# EAGLE board MainsLog-Sensor-SR (EAGLE 5.11)
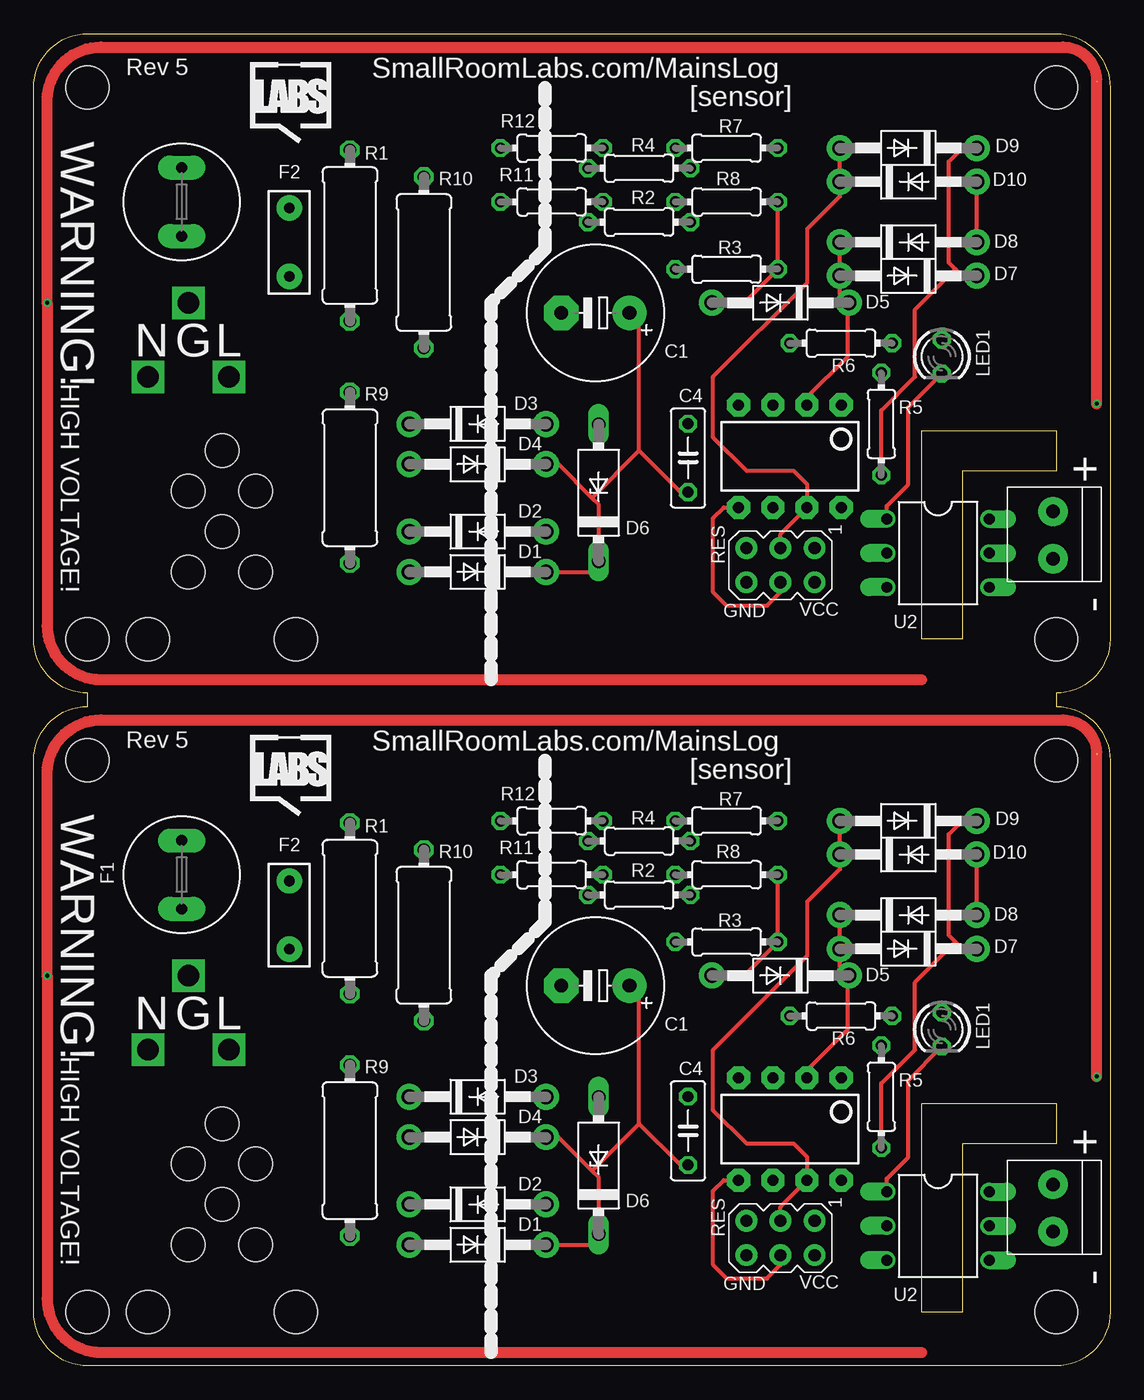
[diagram p0: board, top side]
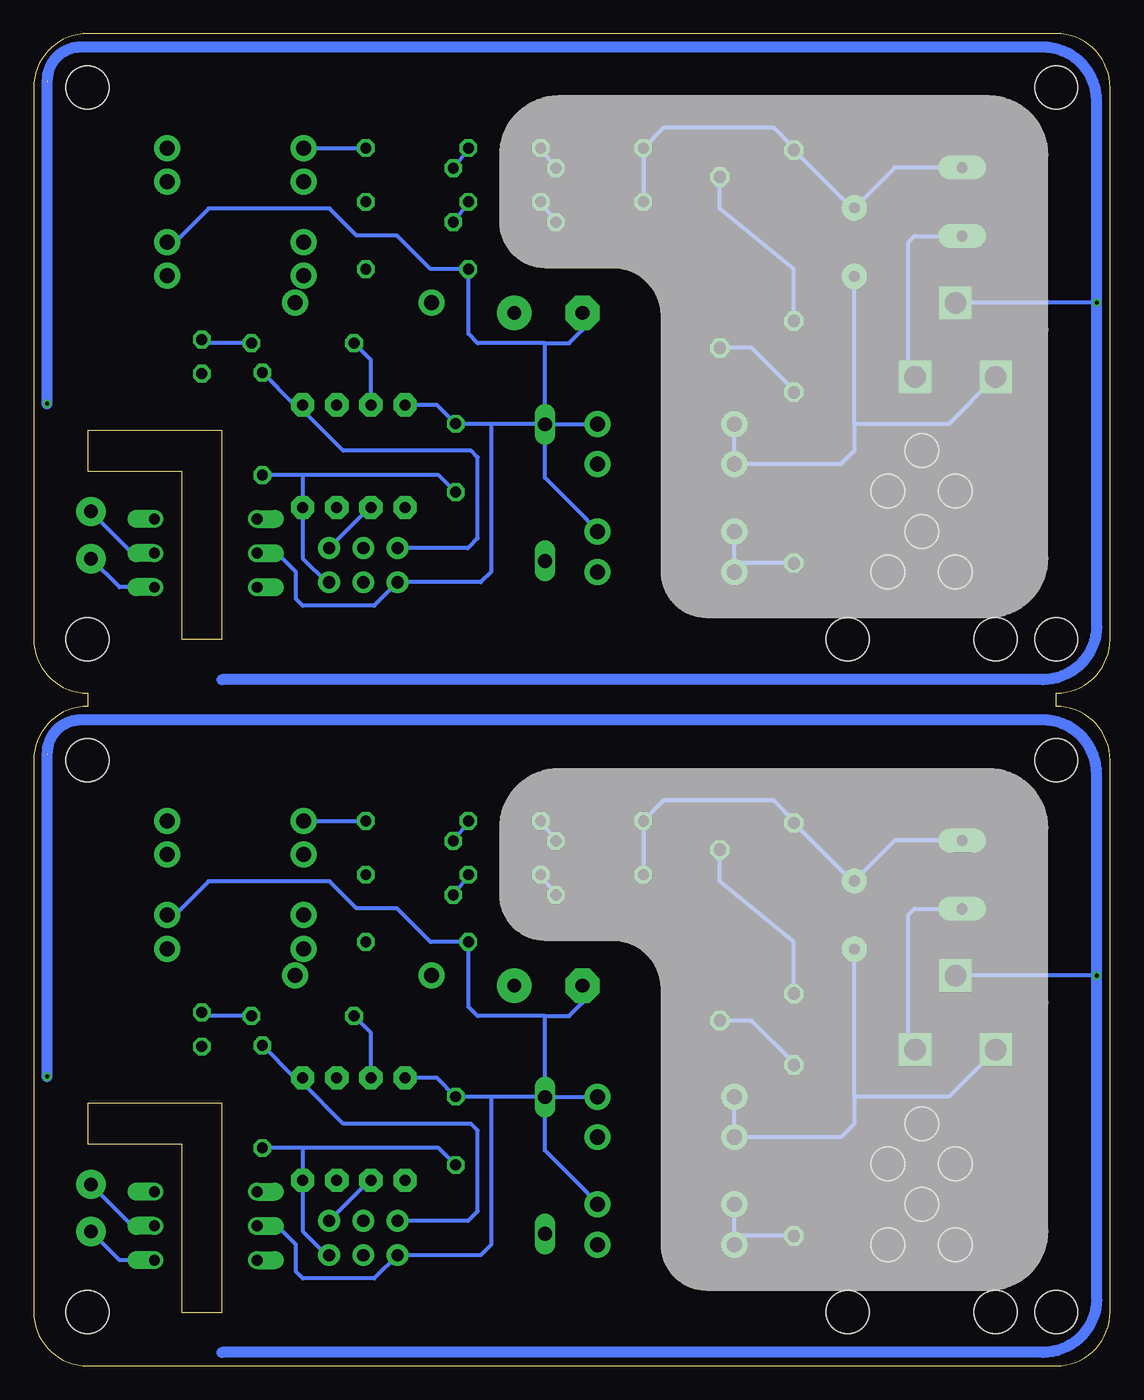
[diagram p1: board, bottom side, seen from below]

Size 80 x 99 mm. Coordinates in mm from the lower left corner, seen from the top.
Outline: 0,95 arc-90 4,99 76,99 arc-90 80,95 80,54 arc-90 76,50 76,49 arc-90 80,45 80,4 arc-90 76,0 4,0 arc-90 0,4 0,45 arc-90 4,49 4,50 arc-90 0,54 0,95
Copper layers (1*16): Top 0.035mm / dielectric 1.5mm / Bottom 0.035mm
Design rules "Fusion_eagle_rule_v1.1": minimum track width 6mil, minimum drill 12mil, track to track 6mil, track to pad 6mil, pad to pad 6mil, via to via 6mil, smd to smd 0mil, copper to edge 10mil, drill to drill 10mil, minimum pad ring 10mil, minimum via ring 6mil, stop-mask expansion 2mil, vias tented up to drill 100mil, thermal gap 10mil
Net classes: 0 default: width 0.305 mm, drill 0.305 mm, clearance 0.5 mm; 1 HV: width 0.305 mm, drill 0.305 mm, clearance 2 mm
Holes 2.5 mm at 11.5,9 11.5,15 16.5,9 16.5,15 14,12 14,18 11.5,59 11.5,65 16.5,59 16.5,65 14,62 14,68
Holes 3.2 mm at 8.5,4 19.5,4 4,45 4,4 76,4 76,45 8.5,54 19.5,54 4,95 4,54 76,54 76,95
Milling: 12 lines

## Footprints (pad centres in the part's own frame; a part is rotated, then mirrored left to right if it is on the bottom)
E5-10,5 = drill 1.016 pad 2.54 round: + -2.54,0 | drill 1.016 pad 2.54 octagon: - 2.54,0
C050-025X075 = drill 0.813 octagon: 1 -2.54,0; 2 2.54,0
DO41-10 = drill 1.118 pad 1.93 round: A 5.08,0; C -5.08,0
F126Z10 = drill 1.016 long: A 5.08,0; C -5.08,0
TR5 = drill 0.813 pad 1.778 long: 1 -2.54,0; 2 2.54,0
PTC = drill 0.8 pad 1.88 round: P$1 -2.54,0; P$2 2.54,0
AVRISP = drill 0.9 pad 1.626 round: 1 -1.27,2.54; 2 1.27,2.54; 3 -1.27,0; 4 1.27,0; 5 -1.27,-2.54; 6 1.27,-2.54
1X2-3.5MM = drill 1 pad 2.184 round: 1 1.8,0; 2 -1.7,0
LED3MM = drill 0.813 octagon: A -1.27,0; K 1.27,0
0411/12 = drill 0.914 octagon: 1 -6.35,0; 2 6.35,0
0204/7 = drill 0.813 octagon: 1 -3.81,0; 2 3.81,0
DIP08 = drill 0.813 pad 1.727 octagon: 1 -3.81,-3.81; 2 -1.27,-3.81; 3 1.27,-3.81; 4 3.81,-3.81; 5 3.81,3.81; 6 1.27,3.81; 7 -1.27,3.81; 8 -3.81,3.81
DIL06 = drill 0.813 offset: 1 -2.54,-3.81; 2 0,-3.81; 3 2.54,-3.81; 4 2.54,3.81; 5 0,3.81; 6 -2.54,3.81

## Placement (x,y rotation side)
C1  470u  [E5-10,5]  41.75,28.25 180 top
C2  470u  [E5-10,5]  41.75,78.25 180 top
C3  100nF  [C050-025X075]  48.63,67.47 90 top
C4  100nF  [C050-025X075]  48.63,17.47 90 top
D1  1N4004  [DO41-10]  33,9 180 top
D2  1N4004  [DO41-10]  33,12 0 top
D3  1N4004  [DO41-10]  33,20 0 top
D4  1N4004  [DO41-10]  33,17 180 top
D5  1N4004  [DO41-10]  55.5,29 180 top
D6  5.1v  [F126Z10]  41.99,14.89 90 top
D7  1N4004  [DO41-10]  65,31 180 top
D8  1N4004  [DO41-10]  65,33.5 0 top
D9  1N4004  [DO41-10]  65,40.5 180 top
D10  1N4004  [DO41-10]  65,38 0 top
D11  1N4004  [DO41-10]  33,59 180 top
D12  1N4004  [DO41-10]  33,67 180 top
D13  1N4004  [DO41-10]  33,62 0 top
D14  1N4004  [DO41-10]  33,70 0 top
D15  5.1v  [F126Z10]  41.99,64.89 90 top
D16  1N4004  [DO41-10]  55.5,79 180 top
D17  1N4004  [DO41-10]  65,81 180 top
D18  1N4004  [DO41-10]  65,83.5 0 top
D19  1N4004  [DO41-10]  65,90.5 180 top
D20  1N4004  [DO41-10]  65,88 0 top
F1  [TR5]  11,36.5 270 top
F2  PTCPTH  [PTC]  19,33.5 270 top
F3  [TR5]  11,86.5 270 top
F4  PTCPTH  [PTC]  19,83.5 270 top
ICSP  AVRISP-6  [AVRISP]  55.5,9.5 270 top
ICSP1  AVRISP-6  [AVRISP]  55.5,59.5 270 top
J1  1X2-3.5MM  [1X2-3.5MM]  75.75,61.69 90 top
J2  1X2-3.5MM  [1X2-3.5MM]  75.75,11.69 90 top
LED1  [LED3MM]  67.5,25 270 top
LED2  [LED3MM]  67.5,75 270 top
R1  270  [0411/12]  23.5,34 270 top
R2  470k  [0204/7]  45,35 0 top
R3  4k7  [0204/7]  51.5,31.5 0 top
R4  470k  [0204/7]  45,39 0 top
R5  20k  [0204/7]  63,20 270 top
R6  270  [0204/7]  60,26 0 top
R7  470k  [0204/7]  51.5,40.5 0 top
R8  470k  [0204/7]  51.5,36.5 0 top
R9  270  [0411/12]  23.5,16 270 top
R10  270  [0411/12]  29,32 270 top
R11  470k  [0204/7]  38.5,36.5 0 top
R12  470k  [0204/7]  38.5,40.5 0 top
R13  270  [0411/12]  23.5,84 270 top
R14  470k  [0204/7]  45,85 0 top
R15  4k7  [0204/7]  51.5,81.5 0 top
R16  270  [0204/7]  60,76 0 top
R17  470k  [0204/7]  45,89 0 top
R18  20k  [0204/7]  63,70 270 top
R19  470k  [0204/7]  51.5,90.5 0 top
R20  470k  [0204/7]  51.5,86.5 0 top
R21  270  [0411/12]  23.5,66 270 top
R22  270  [0411/12]  29,82 270 top
R23  470k  [0204/7]  38.5,86.5 0 top
R24  470k  [0204/7]  38.5,90.5 0 top
U1  ATTINY45DIP8  [DIP08]  56.2,17.6 180 top
U2  4N35  [DIL06]  67.21,10.4 270 top
U3  ATTINY45DIP8  [DIP08]  56.2,67.6 180 top
U4  4N35  [DIL06]  67.21,60.4 270 top
U$1  [SRL-LOGO-SILK-5MM]  16.07,91.93 0 top
U$2  [SRL-LOGO-SILK-5MM]  16.07,41.93 0 top

## Library data of the parts
C1 C2 = resistor
C3 C4 R1-R24 = rcl
D1-D5 D7-D14 D16-D20 ICSP ICSP1 J1 J2 = adafruit
D6 D15 = diode
F1 F3 = fuse; OC_FARNELL: unknown; OC_NEWARK: unknown
F2 F4 U1 U3 = SparkFun
LED1 LED2 = led
U2 U4 = optocoupler; MF: FAIRCHILD SEMICONDUCTOR; MPN: 4N35; OC_FARNELL: 1328375; OC_NEWARK: 72K9946
U$1 U$2 = SmallRoomLabs

## Nets
FREQ/SCK: D9.A D10.C ICSP.3 R7.2 U1.7
FREQ/SCK1: D19.A D20.C ICSP1.3 R19.2 U3.7
GND: C1.- C4.2 D2.A D3.A D6.A D8.A D10.A ICSP.6 R3.1 U1.4 U2.2
GND1: C2.- C3.2 D13.A D14.A D15.A D18.A D20.A ICSP1.6 R15.1 U3.4 U4.2
LIVE [HV]: F1.2
LIVE1 [HV]: F3.2
LIVE-LIMITED [HV]: D1.A D2.C R9.2
LIVE-LIMITED1 [HV]: D11.A D13.C R21.2
MISO: ICSP.1 U1.6
MISO1: ICSP1.1 U3.6
MOSI: ICSP.4 U1.5
MOSI1: ICSP1.4 U3.5
N$1 [HV]: R1.2 R10.1
N$2 [HV]: R2.2 R8.1
N$3: LED1.K U2.1
N$4 [HV]: R4.2 R7.1
N$5 [HV]: R9.1 R10.2
N$6 [HV]: F1.1 F2.P$1 R1.1 R11.1 R12.1
N$7 [HV]: F3.1 F4.P$1 R13.1 R23.1 R24.1
N$8: LED1.A R6.2
N$9: R6.1 U1.3
N$10: D5.A R3.2 R8.2
N$11 [HV]: R2.1 R11.2
N$12 [HV]: R4.1 R12.2
N$13 [HV]: R14.2 R20.1
N$14 [HV]: R17.2 R19.1
N$15: LED2.K U4.1
N$16: LED2.A R16.2
N$17: R16.1 U3.3
N$18 [HV]: R13.2 R22.1
N$19 [HV]: R21.1 R22.2
N$20 [HV]: R14.1 R23.2
N$21 [HV]: R17.1 R24.2
N$22: D16.A R15.2 R20.2
NEUTRAL [HV]: D3.C D4.A F2.P$2
NEUTRAL1 [HV]: D12.A D14.C F4.P$2
OUT: J2.1 U2.5
OUT1: J1.1 U4.5
OUT-GND: J2.2 U2.4
OUT-GND1: J1.2 U4.4
RES: ICSP.5 R5.1 U1.1
RES1: ICSP1.5 R18.1 U3.1
VCC: C1.+ C4.1 D1.C D4.C D6.C D7.C D9.C ICSP.2 R5.2 U1.8
VCC1: C2.+ C3.1 D11.C D12.C D15.C D17.C D19.C ICSP1.2 R18.2 U3.8
VOLTAGE: D5.C D7.A D8.C U1.2
VOLTAGE1: D16.C D17.A D18.C U3.2

## Tracks (layer width: path | path; a pad name or v marks a point on that pad's centre or on a via)
EARTH  (via drill 0.3, 1.6)  (1 unrouted)
  Top 0.8: 66,1 5,1 arc-90 1,5 v1,29 1,44 arc-90 5,48 76.5,48 arc-90 79,45.5 | v79,21.5 79,45.4
  Bottom 0.305: v1,29 v11.5,29
  Bottom 0.8: 66,1 5,1 arc-90 1,5 v1,29 1,44 arc-90 5,48 76.5,48 arc-90 79,45.5 | v79,21.5 79,45.3
EARTH1  (via drill 0.3, 1.6)  (1 unrouted)
  Top 0.8: 66,51 5,51 arc-90 1,55 v1,79 1,94 arc-90 5,98 76.5,98 arc-90 79,95.5 | v79,71.5 79,95.4
  Bottom 0.305: v1,79 v11.5,79
  Bottom 0.8: 66,51 5,51 arc-90 1,55 v1,79 1,94 arc-90 5,98 76.5,98 arc-90 79,95.5 | v79,71.5 79,95.3
FREQ/SCK
  Top 0.305: D9.A D10.C 59.92,36.92 57.5,34.5 57.5,30.5 50.5,23.5 50.5,19 53,16.5 56.5,16.5 57.5,15.5 57.5,13.81 U1.7 55.5,11.81 ICSP.3
  Bottom 0.305: D9.A R7.2
FREQ/SCK1
  Top 0.305: D19.A D20.C 59.92,86.92 57.5,84.5 57.5,80.5 50.5,73.5 50.5,69 53,66.5 56.5,66.5 57.5,65.5 57.5,63.81 U3.7 55.5,61.81 ICSP1.3
  Bottom 0.305: D19.A R19.2
GND
  Top 0.305: D8.A D10.A
  Bottom 0.305: U1.4 50.03,21.41 C4.2 46,20 | 46,20 42.02,20 D6.A | D2.A 39,13 42,16 D6.A | D3.A 41.96,20 D6.A | U2.2 61.9,10.4 60.5,9 60.5,7 60,6.5 54.69,6.5 ICSP.6 46.77,8.23 46,9 46,20 | D8.A 69.5,33.5 67,36 58,36 56,34 53,34 50.5,31.5 R3.1 47.69,26.69 47,26 42,26 | 42,26 40.21,26 39.21,27 C1.- | D6.A 41.99,25.99 42,26
GND1
  Top 0.305: D18.A D20.A
  Bottom 0.305: U3.4 50.03,71.41 C3.2 46,70 | 46,70 42.02,70 D15.A | D13.A 39,63 42,66 D15.A | D14.A 41.96,70 D15.A | U4.2 61.9,60.4 60.5,59 60.5,57 60,56.5 54.69,56.5 ICSP1.6 46.77,58.23 46,59 46,70 | D18.A 69.5,83.5 67,86 58,86 56,84 53,84 50.5,81.5 R15.1 47.69,76.69 47,76 42,76 | 42,76 40.21,76 39.21,77 C2.- | D15.A 41.99,75.99 42,76
LIVE  (via drill 1.6)
  Bottom 0.305: F1.2 14.54,33.96 15,33.5 15,24 v14.5,23.5
LIVE1  (via drill 1.6)
  Bottom 0.305: F3.2 14.54,83.96 15,83.5 15,74 v14.5,73.5
LIVE-LIMITED
  Bottom 0.305: D2.C D1.A 27.57,9.65 R9.2
LIVE-LIMITED1
  Bottom 0.305: D13.C D11.A 27.57,59.65 R21.2
MISO
  Bottom 0.305: U1.6 55.02,13.79 ICSP.1
MISO1
  Bottom 0.305: U3.6 55.02,63.79 ICSP1.1
MOSI
  Top 0.305: U1.5 51.29,13.79 50.5,13 50.5,7.5 51.5,6.5 54.5,6.5 55.5,7.5 ICSP.4
MOSI1
  Top 0.305: U3.5 51.29,63.79 50.5,63 50.5,57.5 51.5,56.5 54.5,56.5 55.5,57.5 ICSP1.4
N$1
  Bottom 0.305: R10.1 29,36 23.5,31.5 R1.2
N$2
  Bottom 0.305: R8.1 R2.2
N$3
  Top 0.305: U2.1 63.4,13.9 65,15.5 65,21.23 LED1.K
N$4
  Bottom 0.305: R7.1 R4.2
N$5
  Bottom 0.305: R9.1 23.5,22.5 26.65,25.65 R10.2
N$6
  Bottom 0.305: F2.P$1 18.96,36 | F2.P$1 19.19,36.04 R1.1 23.5,40.5 25,42 33.19,42 R12.1 R11.1 | F1.1 16,39.04 F2.P$1
N$7
  Bottom 0.305: F4.P$1 18.96,86 | F4.P$1 19.19,86.04 R13.1 23.5,90.5 25,92 33.19,92 R24.1 R23.1 | F3.1 16,89.04 F4.P$1
N$8
  Bottom 0.305: R6.2 67.23,26 LED1.A
N$9
  Bottom 0.305: U1.3 54.93,24.74 R6.1
N$10
  Top 0.305: R8.2 R3.2 52.81,29 D5.A
N$11
  Bottom 0.305: R2.1 R11.2
N$12
  Bottom 0.305: R4.1 R12.2
N$13
  Bottom 0.305: R20.1 R14.2
N$14
  Bottom 0.305: R19.1 R17.2
N$15
  Top 0.305: U4.1 63.4,63.9 65,65.5 65,71.23 LED2.K
N$16
  Bottom 0.305: R16.2 67.23,76 LED2.A
N$17
  Bottom 0.305: U3.3 54.93,74.74 R16.1
N$18
  Bottom 0.305: R22.1 29,86 23.5,81.5 R13.2
N$19
  Bottom 0.305: R21.1 23.5,72.5 26.65,75.65 R22.2
N$20
  Bottom 0.305: R14.1 R23.2
N$21
  Bottom 0.305: R17.1 R24.2
N$22
  Top 0.305: R20.2 R15.2 52.81,79 D16.A
NEUTRAL  (via drill 1.6)
  Bottom 0.305: D3.C D4.A 20,17 19,18 19,20 | 19,20 F2.P$2 | 19,20 12,20 v8.5,23.5
NEUTRAL1  (via drill 1.6)
  Bottom 0.305: D14.C D12.A 20,67 19,68 19,70 | 19,70 F4.P$2 | 19,70 12,70 v8.5,73.5
OUT
  Bottom 0.305: U2.5 72.66,10.4 J2.1
OUT1
  Bottom 0.305: U4.5 72.66,60.4 J1.1
OUT-GND
  Bottom 0.305: U2.4 73.62,7.86 J2.2
OUT-GND1
  Bottom 0.305: U4.4 73.62,57.86 J1.2
RES
  Bottom 0.305: ICSP.5 47.73,10.77 47,11.5 47,17.5 47.5,18 57,18 60.01,21.01 U1.1 60.6,21.41 R5.1
RES1
  Bottom 0.305: ICSP1.5 47.73,60.77 47,61.5 47,67.5 47.5,68 57,68 60.01,71.01 U3.1 60.6,71.41 R18.1
VCC
  Top 0.305: D1.C 41.8,9 D6.C 42,14 41.5,14.5 | D4.C 39,17 41.5,14.5 | 45,18 45,27.53 C1.+ | D9.C 69,40.5 68,39.5 68,32 68.5,31.5 | 68.5,31.5 69,31 D7.C | 41.5,14.5 45,18 | 45,18 48,15 48.56,15 C4.1 | R5.2 63,21 65.5,23.5 65.5,28.5 68.5,31.5
  Bottom 0.305: ICSP.2 58.23,8.23 60,10 60,13.77 U1.8 60,16.19 | 60,16.19 49.9,16.19 C4.1 | 60,16.19 R5.2
VCC1
  Top 0.305: D11.C 41.8,59 D15.C 42,64 41.5,64.5 | D12.C 39,67 41.5,64.5 | 45,68 45,77.53 C2.+ | D19.C 69,90.5 68,89.5 68,82 68.5,81.5 | 68.5,81.5 69,81 D17.C | 41.5,64.5 45,68 | 45,68 48,65 48.56,65 C3.1 | R18.2 63,71 65.5,73.5 65.5,78.5 68.5,81.5
  Bottom 0.305: ICSP1.2 58.23,58.23 60,60 60,63.77 U3.8 60,63.8 60,66.19 | 60,66.19 49.9,66.19 C3.1 | 60,66.19 R18.2
VOLTAGE
  Top 0.305: D8.C D7.A 59.92,29.66 D5.C 60.5,28.92 60.5,25 57.47,21.97 U1.2
VOLTAGE1
  Top 0.305: D18.C D17.A 59.92,79.66 D16.C 60.5,78.92 60.5,75 57.47,71.97 U3.2

## Text on the board
tPlace: Rev 5 | SmallRoomLabs.com/MainsLog | [sensor] | WARNING! | D9 | F2 | R10 | D10 | R3 | D8 | D7 | D5 | LED1 | C1 | N | G | L | R6 | HIGH VOLTAGE! | C4 | R9 | R5 | + | D6 | RES | GND | VCC | - | U2 | Rev 5 | SmallRoomLabs.com/MainsLog | [sensor] | WARNING! | D9 | F2 | R10 | D10 | R3 | D8 | D7 | D5 | LED1 | C1 | N | G | L | R6 | HIGH VOLTAGE! | C4 | R9 | R5 | + | D6 | RES | GND | VCC | - | U2
tNames: R7 | R12 | R1 | R4 | R8 | R11 | R2 | D3 | D4 | D2 | D1
_tPlace: R7 | R12 | R1 | R4 | R8 | R11 | F1 | F1 | R2 | D3 | D4 | D2 | D1 | R7 | R7 | R12 | R12 | R1 | R1 | R4 | R4 | R8 | R8 | R11 | R11 | F1 | F1 | R2 | R2 | D3 | D3 | D4 | D4 | D2 | D2 | D1 | D1